# Altium PCB carte_fusee.PcbDoc
Units mm, origin at the board's own origin, x right, y up, seen from the top; angles counter-clockwise.
Board outline 152.4 x 101.6 mm, 2 copper layers (Top Layer, Bottom Layer); 44 components, 71 nets, 213 pads, 0 vias.
Unrouted connection lines stored in the file: 110.
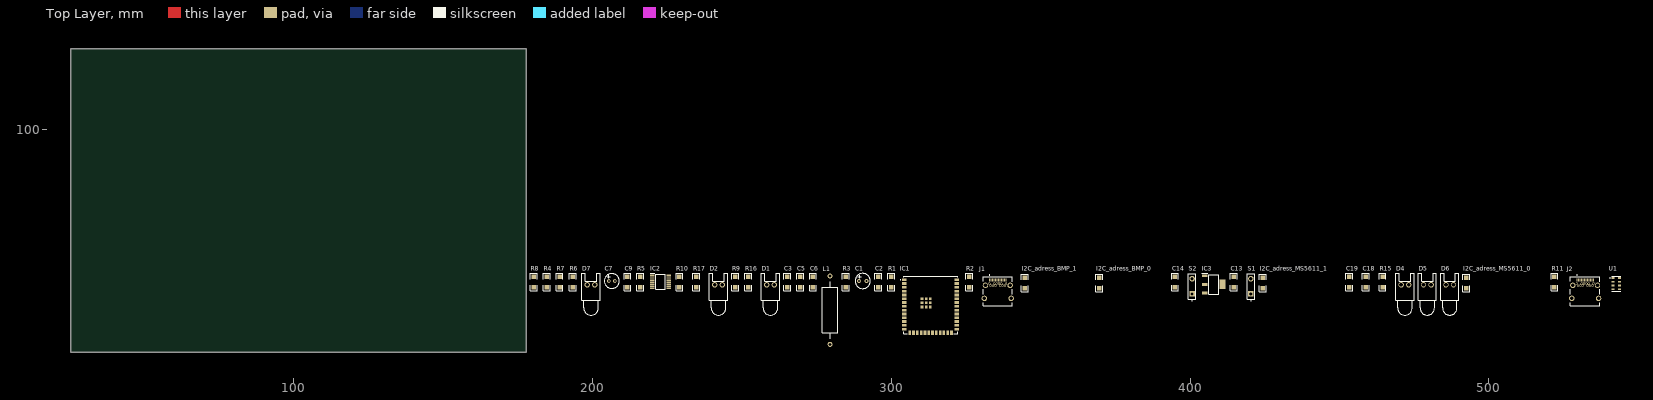
[diagram p0: Top Layer view]
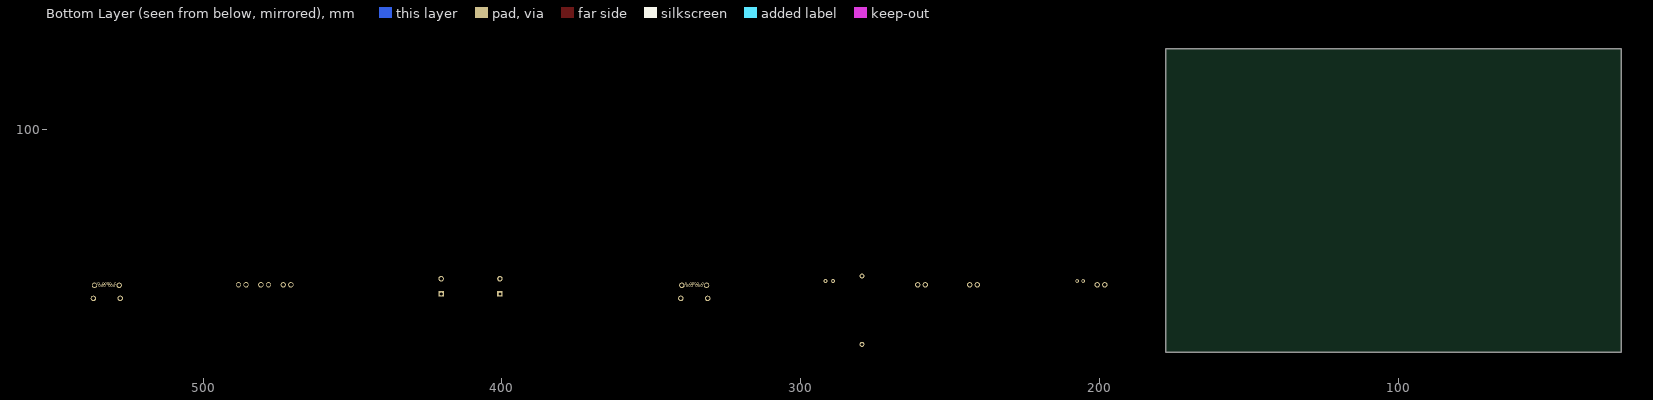
[diagram p1: Bottom Layer view, seen from below]

## Layer stack, top to bottom
Top Solder: solder mask 0.0102, Solder Resist, Dk 3.5
Top Layer: signal copper 0.0356
Dielectric 1: dielectric 0.32, FR-4, Dk 4.8
Bottom Layer: signal copper 0.0356
Bottom Solder: solder mask 0.0102, Solder Resist, Dk 3.5

## Board outline
25.4,25.4 177.8,25.4 177.8,127 25.4,127

## Design rules (kind name [scope] priority, off if disabled: settings)
Clearance [All] p1: gap=0.254 ignorepadtopadclearanceinfootprint=FALSE except(0: Arc-Hole Track-Hole SMDPad-Hole THPad-Hole Via-Hole Fill-Hole Poly-Hole Region-Hole Text-Hole)
DiffPairsRouting [All] p1: maxlimit=0.254 minlimit=0.254 mostfreqgap=0.254 toplayer_minwidth=0.381 toplayer_maxwidth=0.381 toplayer_prefwidth=0.381 bottomlayer_minwidth=0.381 bottomlayer_maxwidth=0.381 bottomlayer_prefwidth=0.381 maxuncoupledlength=12.7
PolygonConnect [All] p1: connectstyle=Relief reliefconductorwidth=0.254 reliefentries=4 polygonreliefangle="90 Angle" airgapwidth=0.254
RoutingVias [All] p1: holewidth=0.711 width=1.27 viastyle="Through Hole" minholewidth=0.711 minwidth=1.27 maxholewidth=0.711 maxwidth=1.27
SolderMaskExpansion [All] p1: expansion=0.102 istentingtop=FALSE
Width [All] p1: maxlimit=0.254 minlimit=0.254 preferedwidth=0.254
29 further rules are at their usual default settings.

## Classes and differential pairs
differential pair USB: +USB_P -USB_N
differential pair ESP_USB: +ESP_USB_P -ESP_USB_N

## Components (designator, comment, footprint, x,y, rotation, side; value= is the part's Value field where it differs from the comment)
C1 "Cap2" "Capacitor 2.5" 289.179,49.276 r0 top value=22µF
C2 "Cap" "Capacitor 1206" 295.656,48.895 r90 top value=0.1µF
C3 "Cap" "Capacitor 1206" 265.176,48.895 r90 top value=1µF
C5 "Cap" "Capacitor 1206" 269.494,48.895 r90 top value=47pF
C6 "Cap" "Capacitor 1206" 273.812,48.895 r90 top value=47pF
C7 "Cap2" Capacitor 205.486,49.276 r0 top value=4.7µF
C9 "Cap" "Capacitor 1206" 211.709,48.895 r90 top value=100nF
C13 "Cap" "Capacitor 1206" 414.655,48.895 r90 top value=0.1µF
C14 "Cap" "Capacitor 1206" 394.97,48.895 r90 top value=0.1µF
C18 "Cap" "Capacitor 1206" 458.851,48.895 r90 top value=47pF
C19 "Cap" "Capacitor 1206" 453.263,48.895 r90 top value=47pF
D1 "RX_LED" LED-0 259.588,48.006 r0 top
D2 "TX_LED" LED-0 242.189,48.006 r0 top
D4 "VDD" LED-0 471.932,48.006 r0 top
D5 "VDD" LED-0 479.425,48.006 r0 top
D6 "VDD" LED-0 486.918,48.006 r0 top
D7 "VDD" LED-0 199.517,48.006 r0 top
I2C_adress_BMP_0 "Res2" "Resistor 1206" 369.57,48.641 r90 top
I2C_adress_BMP_1 "Res2" "Resistor 1206" 344.678,48.641 r90 top
I2C_adress_MS5611_0 "Res2" "Resistor 1206" 492.506,48.641 r90 top
I2C_adress_MS5611_1 "Res2" "Resistor 1206" 424.307,48.641 r90 top
IC1 "ESP32-S3-WROOM-1U-N16R16V" ESP32S3WROOM1UN16 313.182,41.275 r0 top
IC2 "FT230XS-R" SOP64P599X175-16N 222.758,49.022 r0 top
IC3 "AMS1117-5.0" SOT290P700X180-4N 407.924,48.133 r0 top
J1 "1332643" 1332643 335.661,45.847 r0 top
J2 "1332643" 1332643 532.257,45.847 r0 top
L1 "Inductor Iron" AXIAL-0.9 279.527,39.497 r90 top value=27nH
R1 "Res2" "Resistor 1206" 299.974,48.895 r90 top value=10K
R2 "Res2" "Resistor 1206" 326.136,48.895 r90 top value=27
R3 "Res2" "Resistor 1206" 284.734,48.895 r90 top value=27
R4 "Res2" "Resistor 1206" 184.658,48.895 r90 top value=10K
R5 "Res2" "Resistor 1206" 216.027,48.895 r90 top value=10K
R6 "Res2" "Resistor 1206" 193.421,48.895 r90 top value=10K
R7 "Res2" "Resistor 1206" 188.976,48.895 r90 top value=10K
R8 "Res2" "Resistor 1206" 180.34,48.895 r90 top value=10K
R9 "Res2" "Resistor 1206" 247.777,48.895 r90 top value=270
R10 "Res2" "Resistor 1206" 229.108,48.895 r90 top value=270
R11 "Res2" "Resistor 1206" 521.97,48.895 r90 top value=27
R15 "Res2" "Resistor 1206" 464.439,48.895 r90 top value=27
R16 "Res2" "Resistor 1206" 252.095,48.895 r90 top value=10K
R17 "Res2" "Resistor 1206" 234.696,48.895 r90 top value=10K
S1 "BOOT" SPST-2 420.37,47.498 r90 top
S2 "RESET" SPST-2 400.685,47.498 r90 top
U1 "MS561101BA03-50" MS561101BA0350 542.671,48.387 r0 top

## Footprints (in the part's own frame and the unit in brackets; to place one, negate y for a bottom-side part, rotate by r counter-clockwise, add the part's x,y. Pads: shape width x height; smd on the part's side, far side on the other; paste and mask are expansions set on the pad)
1332643 [mm]
  rect 0.3x0.9 smd: A1(-2.75,3.795) A2(-2.25,3.795) A3(-1.75,3.795) A4(-1.25,3.795) A5(-0.75,3.795) A6(-0.25,3.795) A7(0.25,3.795) A8(0.75,3.795) A9(1.25,3.795) A10(1.75,3.795) A11(2.25,3.795) A12(2.75,3.795)
  round 0.7 hole 0.4: B1(2.8,2.585) B2(2.4,1.885) B3(1.6,1.885) B4(1.2,2.585) B5(0.8,1.885) B6(0.4,2.585) B7(-0.4,2.585) B8(-0.8,1.885) B9(-1.2,2.585) B10(-1.6,1.885) B11(-2.4,1.885) B12(-2.8,2.585)
  round 0.325 hole 0.65 unplated: MH1(-3.6,3.235)
  round 0.475 hole 0.95 unplated: MH2(3.6,3.235)
  round 1.815 hole 1.21: MH3(4.13,1.995) MH4(-4.13,1.995) MH5(-4.49,-2.405) MH6(4.49,-2.405)
  silkscreen extent -4.92,-4.93 4.92,5.5, body extent -4.92,-4.93 4.93,4.94, height 3.36
AXIAL-0.9 [mm] "Axial Device, Thru-Hole; 2 Leads; 0.9 in Pin Spacing"
  round 1.65 hole 1: 1(-11.43,0) 2(11.43,0)
  silkscreen extent -9.53,-2.54 9.53,2.54
Capacitor [mm] "10 - 4.7 uF 2mm"
  round 1.2 hole 0.7: 1(0,0) 2(2,0)
  silkscreen extent -1.5,-2.5 3.5,2.5
"Capacitor 2.5" [mil] "100mil"
  round 50 hole 28: 1(0,0) 2(100,0)
  silkscreen extent -50,-100 150,100
"Capacitor 1206" [mm]
  rect 1.5x1.5 smd: 1(-1.75,0) 2(1.75,0)
  silkscreen extent -2.89,-1.14 2.89,1.14, body extent -1.98,-0.99 1.98,0.96, height 1.3
ESP32S3WROOM1UN16 [mm]
  rect 1.5x0.9 smd: 1(-8.75,8.41) 2(-8.75,7.14) 3(-8.75,5.87) 4(-8.75,4.6) 5(-8.75,3.33) 6(-8.75,2.06) 7(-8.75,0.79) 8(-8.75,-0.48) 9(-8.75,-1.75) 10(-8.75,-3.02) 11(-8.75,-4.29) 12(-8.75,-5.56) 13(-8.75,-6.83) 14(-8.75,-8.1) 27(8.75,-8.1) 28(8.75,-6.83) 29(8.75,-5.56) 30(8.75,-4.29) 31(8.75,-3.02) 32(8.75,-1.75) 33(8.75,-0.48) 34(8.75,0.79) 35(8.75,2.06) 36(8.75,3.33) 37(8.75,4.6) 38(8.75,5.87) 39(8.75,7.14) 40(8.75,8.41)
  rect 0.9x1.5 smd: 15(-6.985,-9.35) 16(-5.715,-9.35) 17(-4.445,-9.35) 18(-3.175,-9.35) 19(-1.905,-9.35) 20(-0.635,-9.35) 21(0.635,-9.35) 22(1.905,-9.35) 23(3.175,-9.35) 24(4.445,-9.35) 25(5.715,-9.35) 26(6.985,-9.35)
  rect 0.9x0.9 smd: 41(-1.5,0.69) 42(-1.5,2.09) 43(-2.9,2.09) 44(-2.9,0.69) 45(-2.9,-0.71) 46(-1.5,-0.71) 47(-0.1,-0.71) 48(-0.1,0.69) 49(-0.1,2.09)
  silkscreen extent -10.1,-9.6 9,9.6, body extent -9,-9.6 9,9.6, height 3.45
LED-0 [mil] "LED; 2 Leads"
  round 70 hole 50: 1(50,0) 2(-50,0)
  silkscreen extent -120,-400 120,150
MS561101BA0350 [mm]
  rect 1.1x0.6 smd: 1(-1.1,1.875) 2(-1.1,0.625) 3(-1.1,-0.625) 4(-1.1,-1.875) 5(1.1,-1.875) 6(1.1,-0.625) 7(1.1,0.625) 8(1.1,1.875)
  silkscreen extent -2.2,-2.5 1.5,2.5, body extent -1.59,-2.5 1.59,2.5, height 1.15
"Resistor 1206" [mm]
  rect 1.5x1.5 smd: 1(-1.75,0) 2(1.75,0)
  silkscreen extent -2.89,-1.14 2.89,1.14, body extent -1.98,-0.95 1.98,0.93, height 0.55
SOP64P599X175-16N [mm]
  rect 1.526x0.435 smd: 1(-2.712,2.222) 2(-2.712,1.588) 3(-2.712,0.952) 4(-2.712,0.318) 5(-2.712,-0.318) 6(-2.712,-0.952) 7(-2.712,-1.588) 8(-2.712,-2.222) 9(2.712,-2.222) 10(2.712,-1.588) 11(2.712,-0.952) 12(2.712,-0.318) 13(2.712,0.318) 14(2.712,0.952) 15(2.712,1.588) 16(2.712,2.222)
  silkscreen extent -3.47,-2.45 1.6,2.79, body extent -3,-2.45 3,2.45, height 1.75
SOT290P700X180-4N [mm]
  rect 1.95x0.9 smd: 1(-3,2.9) 2(-3,0) 3(-3,-2.9)
  rect 1.95x3.2 smd: 4(3,0)
  silkscreen extent -3.98,-3.25 1.68,3.7, body extent -3.5,-3.25 3.5,3.25, height 1.8
SPST-2 [mm] "Switch; 2 Leads"
  rect 1.85x1.85 hole 1.1: 1(-2.54,0)
  round 1.85 hole 1.1: 2(2.54,0)
  silkscreen extent -4.89,-1.27 4.28,1.27

## Part data
C1 C2 C3 C5 C6 C7 C9 C13 C14 C18 C19: "Capacitor", Publisher="Altium Limited"
  C1 C7: PackageDescription="Capacitor; 2 Leads", PackageReference=CAPR5-4X5, Published=23-Sep-2002
  C2 C3 C5 C6 C9 C13 C14 C18 C19: LatestRevisionDate=17-Jul-2002, LatestRevisionNote="Re-released for DXP Platform.", PackageDescription="Radial Cap, Thru-Hole; 2 Leads; 0.3 in Pin Spacing", PackageReference=RAD-0.3, Published=8-Jun-2000
D1 D2 D4 D5 D6 D7: library part LED0, "Typical INFRARED GaAs LED", LatestRevisionDate=08-Jul-2005, LatestRevisionNote="Mech Layer 1 removed.", PackageDescription="LED; 2 Leads", PackageReference=LED-0, Published=8-Jun-2000, Publisher="Altium Limited"
I2C_adress_BMP_0 I2C_adress_BMP_1 I2C_adress_MS5611_0 I2C_adress_MS5611_1 R1 R2 R3 R4 R5 R6 R7 R8 R9 R10 R11 R15 R16 R17: "Resistor", LatestRevisionDate=17-Jul-2002, LatestRevisionNote="Re-released for DXP Platform.", PackageDescription="Axial Device, Thru-Hole; 2 Leads; 0.4 in Pin Spacing", PackageReference=AXIAL-0.4, Published=8-Jun-2000, Publisher="Altium Limited"
IC1: library part ESP32-S3-WROOM-1U-N16, "Integrated Circuit", Manufacturer_Name="Espressif Systems", Mouser Part Number=356-ESP32S3WROM1UN16, Datasheet Link=https://www.espressif.com/sites/default/files/documentation/esp32-s3-wroom-1_wroom-1u_datasheet_en.pdf, Height=3.35mm, Manufacturer_Part_Number=ESP32-S3-WROOM-1U-N16, Mouser Price/Stock=https://www.mouser.co.uk/ProductDetail/Espressif-Systems/ESP32-S3-WROOM-1U-N16?qs=Li%252BoUPsLEntAI1ynUyotnA%3D%3D
IC2: "Integrated Circuit", Manufacturer_Name="FTDI(Future Designs)", Datasheet Link=https://ftdichip.com/wp-content/uploads/2021/10/DS_FT230X.pdf, Height=1.753mm, Manufacturer_Part_Number=FT230XS-R
IC3: "Integrated Circuit", Manufacturer_Name=Shikues, Datasheet Link=https://datasheet.lcsc.com/szlcsc/SK-AMS1117-5-0_C165483.pdf, Height=1.8mm, Manufacturer_Part_Number=AMS1117-5.0
J1 J2: "Connector", Manufacturer_Name="Phoenix Contact", Mouser Part Number=651-1332643, Arrow Part Number=1332643, Arrow Price/Stock=https://www.arrow.com/en/products/1332643/phoenix-contact?region=nac, Datasheet Link=http://www.phoenixcontact.com/de/produkte/1332643, Height=3.31mm, Manufacturer_Part_Number=1332643, Mouser Price/Stock=https://www.mouser.co.uk/ProductDetail/Phoenix-Contact/1332643?qs=Znm5pLBrcAJhPoOCsTWMGg%3D%3D
L1: "Magnetic-Core Inductor", LatestRevisionDate=17-Jul-2002, LatestRevisionNote="Re-released for DXP Platform.", PackageDescription="Axial Device, Thru-Hole; 2 Leads; 0.9 in Pin Spacing", PackageReference=AXIAL-0.9, Published=24-Mar-1999, Publisher="Altium Limited"
S1 S2: library part SW-SPST, "Single-Pole, Single-Throw Switch", LatestRevisionDate=17-Jul-2002, LatestRevisionNote="Re-released for DXP Platform.", PackageDescription="Switch; 2 Leads", PackageReference=SPST-2, Published=24-Mar-1999, Publisher="Altium Limited"
U1: "Undefined or Miscellaneous", Manufacturer_Name=Mikroe, Datasheet Link=https://www.te.com/commerce/DocumentDelivery/DDEController?Action=showdoc&DocId=Data+Sheet%7FMS5611-01BA03%7FB3%7Fpdf%7FEnglish%7FENG_DS_MS5611-01BA03_B3.pdf%7FMS561101BA03-50, Height=1.05mm, Manufacturer_Part_Number=MS561101BA03-50

## Nets (pads, with @x,y where several pads share a name; then routed paths per layer and width w, separated by ;. In a path a pad name is that pad's centre, name@x,y a point inside that pad or via, vN(x,y) a via of type N, cw(c..) or ccw(c..) an arc to the next point about the centre after c; other vN are vias at no path point)
+3.3V: R5.1 R6.1 R7.1 R8.1
+3V3: C1.1 C2.2 C7.1 C9.2 D4.1 IC1.2 IC2.3 IC2.10 IC2.12 R1.2 R4.1 R16.2 R17.2
+3V3_IO: D6.1 I2C_adress_BMP_1.1 I2C_adress_MS5611_0.1 U1.1 U1.2
+5V: D5.1 IC3.2 J2.A4 J2.B4
+VBAT: IC3.3
CHIP_PU: C3.2 C14.1 IC1.3 R1.1 S2.2
CTS: IC2.6 R8.2
DN: C5.2 J1.A7 J1.B7 R3.1
DN_ESP: C19.2 J2.A7 J2.B7 R15.1
DP: C6.2 J1.A6 J1.B6 R2.2
DP_ESP: C18.2 J2.A6 J2.B6 R11.2
ESP_USB_N: IC1.13 R15.2
ESP_USB_P: IC1.14 R11.1
GND: C1.2 C2.1 C3.1 C5.1 C6.1 C7.2 C9.1 C13.2 C14.2 C18.1 C19.1 IC1.1 IC1.40 IC1.41 IC1.42 IC1.43 IC1.44 IC1.45 IC1.46 IC1.47 IC1.48 IC1.49 IC2.5 IC2.13 IC3.1 IC3.4 J1.A1 J1.A12 J1.B1 J1.B12 J1.MH3 J1.MH4 J1.MH5 J1.MH6 J2.A1 J2.B12 J2.MH3 J2.MH4 J2.MH5 J2.MH6 R9.2 R10.2 S1.1 S2.1
GND_IO: I2C_adress_BMP_0.1 I2C_adress_MS5611_1.1 U1.3
GNSS: D7.2
GPIO0: C13.1 IC1.27 S1.2
GPIO1: IC1.39
GPIO2: IC1.38
GPIO3: IC1.15
GPIO5: IC1.5
GPIO6: IC1.6
GPIO7: IC1.7
GPIO11: IC1.19
GPIO14: IC1.22
GPIO15: IC1.8
GPIO16: IC1.9
GPIO17: IC1.10
GPIO18: IC1.11
GPIO21: IC1.23
GPIO35: IC1.28
GPIO36: IC1.29
GPIO37: IC1.30
GPIO38: IC1.31
GPIO39: IC1.32
GPIO40: IC1.33
GPIO41: IC1.34
GPIO42: IC1.35
GPIO45: IC1.26
GPIO46: IC1.16
GPIO47: IC1.24
GPIO48: IC1.25
INT_GNSS: IC1.4
LED_3V: D4.2
LED_3V_IO: D6.2
LED_5V: D5.2
NetAntena_1: 
NetAntena_2: L1.2
NetD1_1: D1.1 R9.1
NetD2_1: D2.1 R10.1
NetI2C_adress_BMP_0_2: I2C_adress_BMP_0.2 I2C_adress_BMP_1.2
NetI2C_adress_MS5611_0_2: I2C_adress_MS5611_0.2 I2C_adress_MS5611_1.2 U1.4 U1.5
NetIC2_11: IC2.11 R4.2
NetJ2_A12: J2.A12 J2.B1
PPS: D7.1
RESET_GNSS: IC1.21
RF_IN: L1.1
RTS: IC2.2 R7.2
RXLED: D2.2 IC2.7
SCLK: IC1.17 R17.1 U1.8
SDA: IC1.12 R16.1 U1.7
SPI_CS: IC1.18
SPI_MISO: 
SPI_MOSI: 
SPI_SCLK: IC1.20
TXLED: D1.2 IC2.14
UART_RX: IC1.36 IC2.4 R5.2
UART_TX: IC1.37 IC2.1 R6.2
USB_N: IC2.9 R3.2
USB_P: IC2.8 R2.1
VBUS: J1.A4 J1.B4
pads on no net: IC2.15 IC2.16 J1.A2 J1.A3 J1.A5 J1.A8 J1.A9 J1.A10 J1.A11 J1.B2 J1.B3 J1.B5 J1.B8 J1.B9 J1.B10 J1.B11 J1.MH1 J1.MH2 J2.A2 J2.A3 J2.A5 J2.A8 J2.A9 J2.A10 J2.A11 J2.B2 J2.B3 J2.B5 J2.B8 J2.B9 J2.B10 J2.B11 J2.MH1 J2.MH2 U1.6